# Altium PCB PCB1.PcbDoc
Units mil, origin at the board's own origin, x right, y up, seen from the top; angles counter-clockwise.
Board outline 3120.27 x 1545.46 mil, 2 copper layers (Top Layer, Bottom Layer); 25 components, 32 nets, 100 pads, 4 vias.
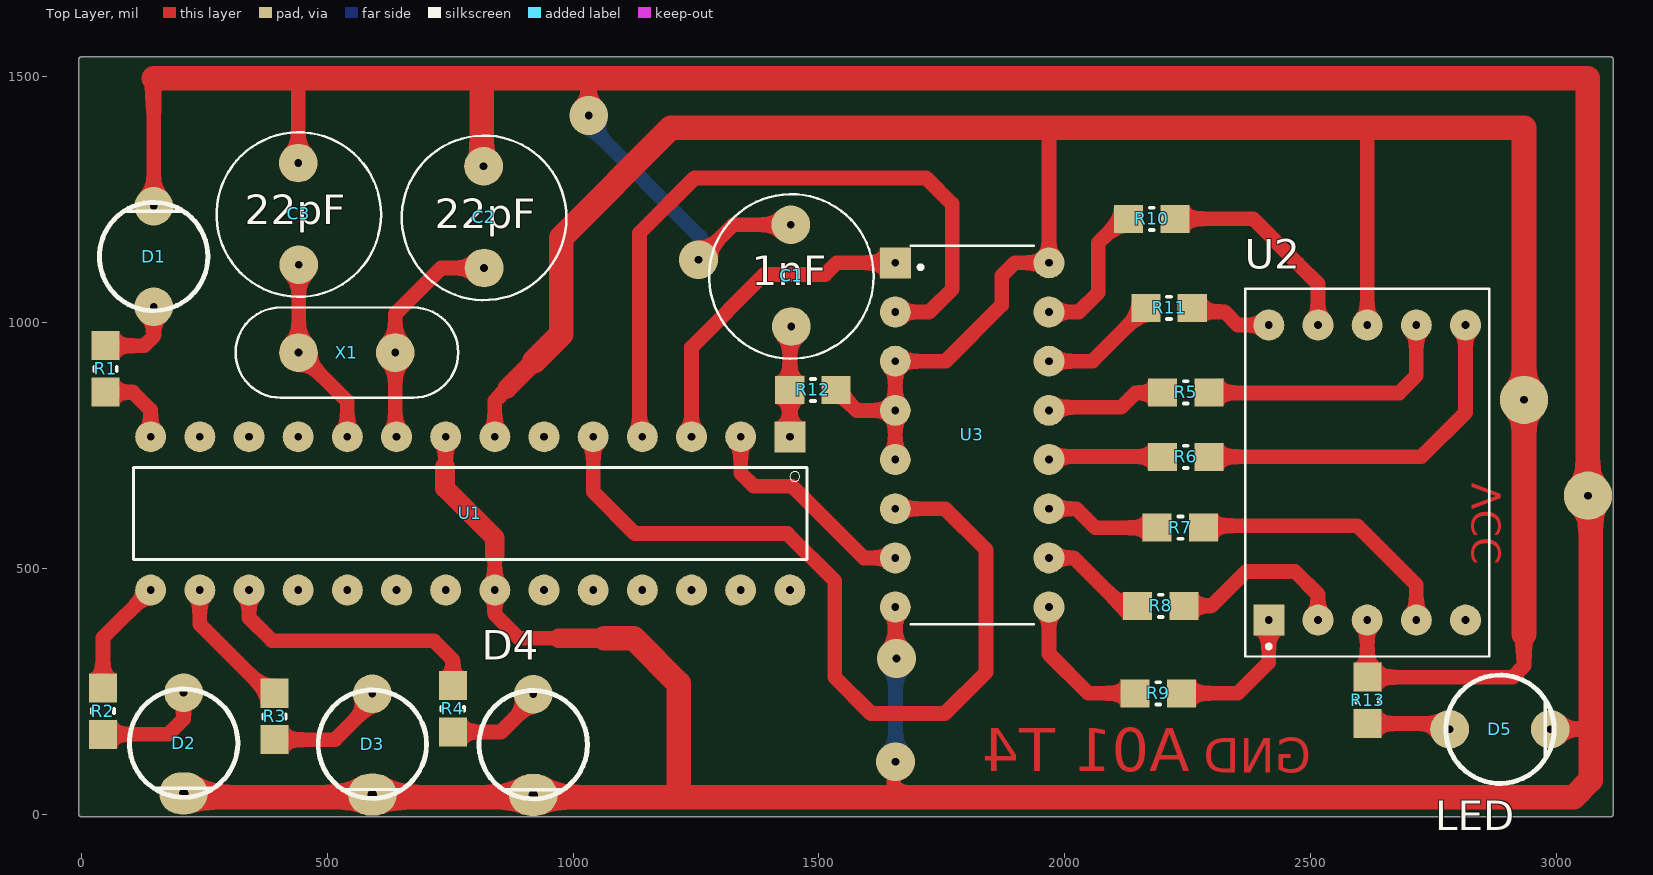
[diagram p0: Top Layer view]
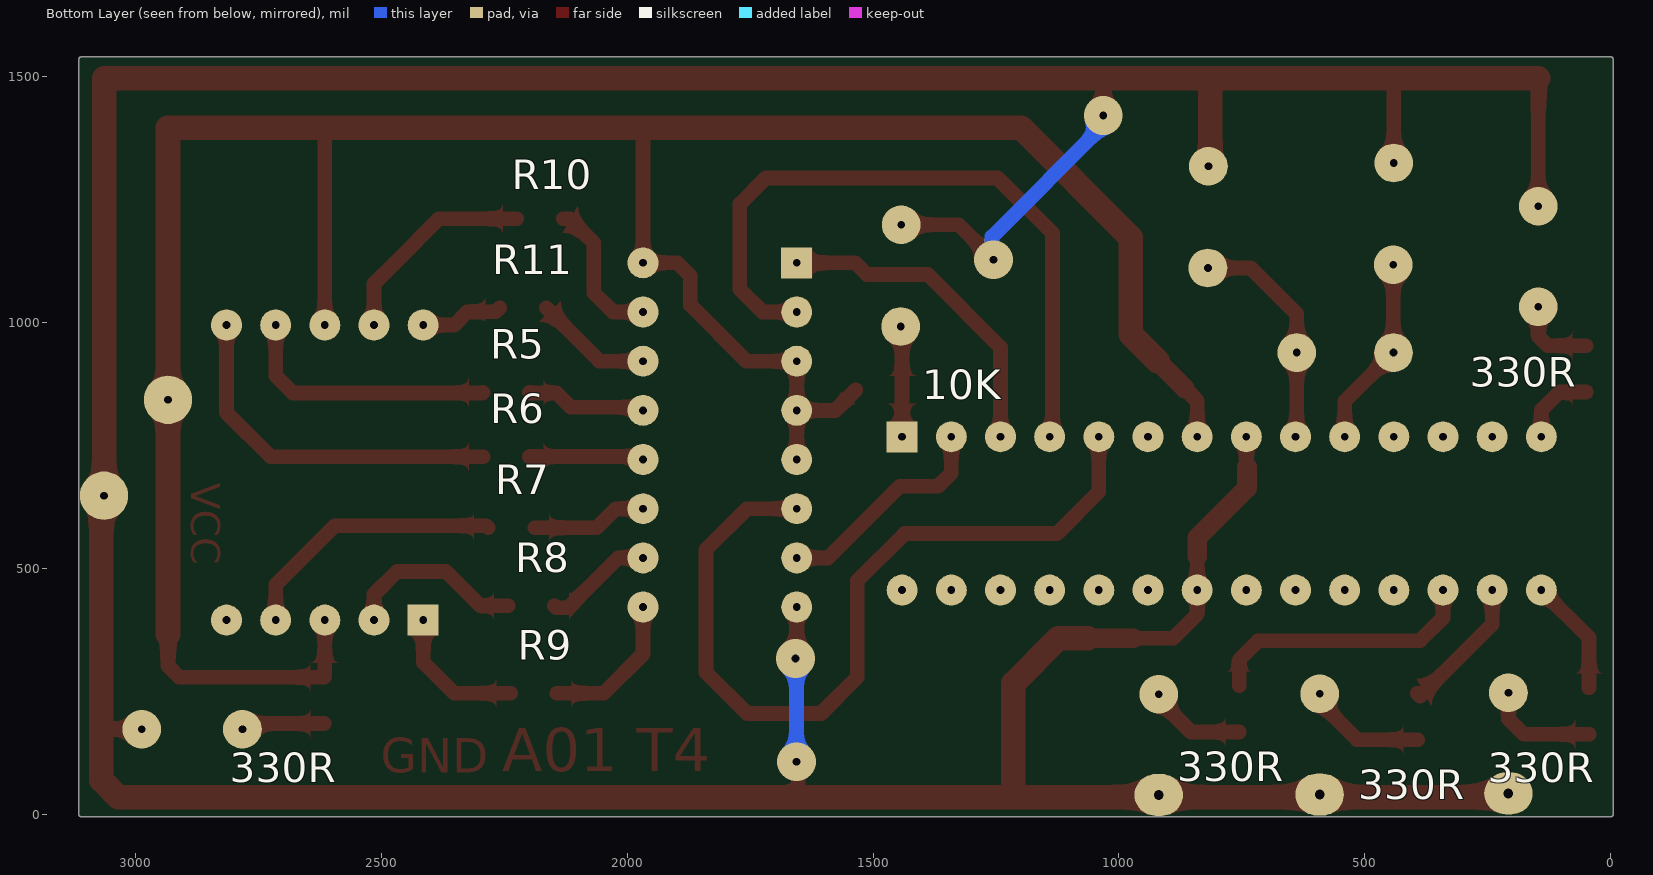
[diagram p1: Bottom Layer view, seen from below]
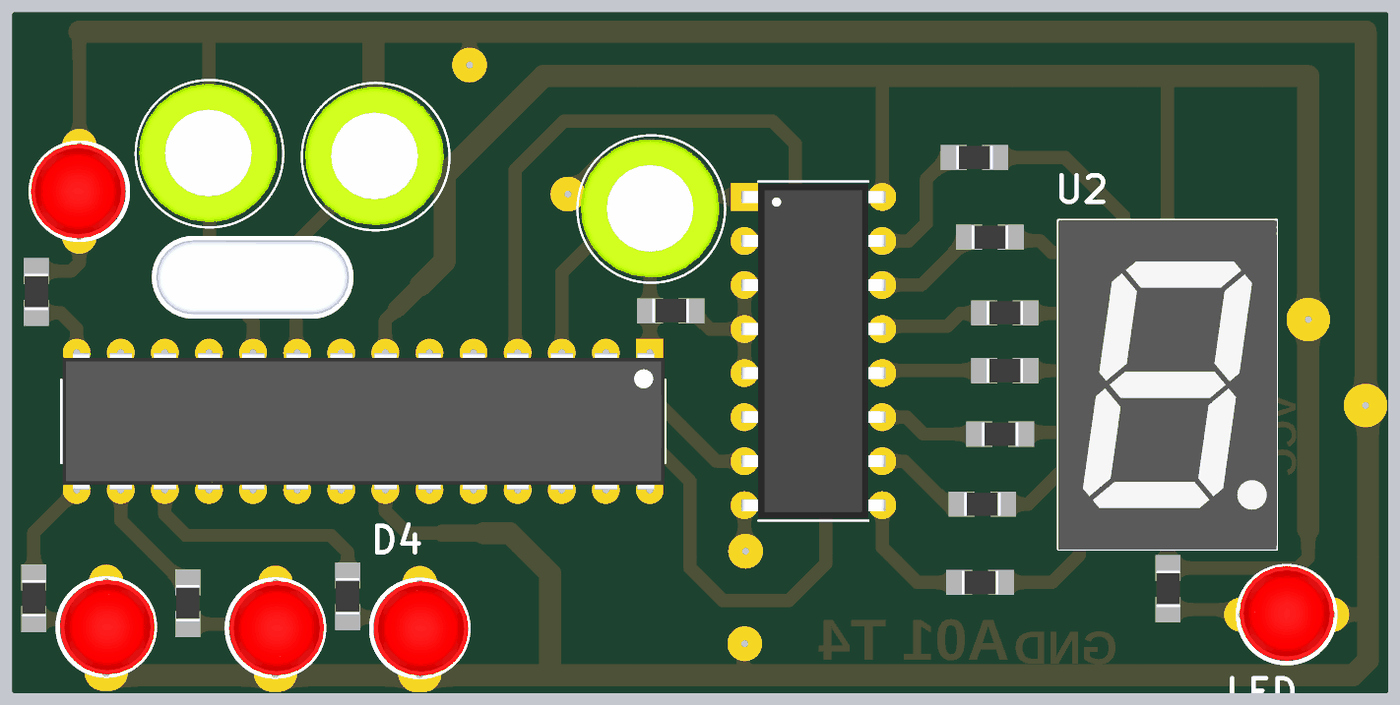
[diagram p2: 3D render of the assembled board from above, using the file's embedded part models]

## Layer stack, top to bottom
Top Solder: solder mask 0.4, Solder Resist, Dk 3.5
Top Layer: signal copper 1.4
Dielectric 1: dielectric 12.6, FR-4, Dk 4.8
Bottom Layer: signal copper 1.4
Bottom Solder: solder mask 0.4, Solder Resist, Dk 3.5

## Board outline
0,-5.01 cw(c0,0) -5.01,0 -5.01,1535.43 cw(c0,1535.43) 0,1540.45 3110.24,1540.45 cw(c3110.24,1535.43) 3115.25,1535.43 3115.25,0 cw(c3110.24,0) 3110.24,-5.01

## Design rules (kind name [scope] priority, off if disabled: settings)
Clearance [All] p1: gap=30 ignorepadtopadclearanceinfootprint=FALSE except(0: Arc-Text Track-Text SMDPad-Text THPad-Text Via-Text Fill-Text Poly-Text Region-Text Text-Text)
PolygonConnect [All] p1: connectstyle=Relief reliefconductorwidth=10 reliefentries=4 polygonreliefangle="90 Angle" airgapwidth=10
RoutingVias [All] p1: holewidth=28 width=50 viastyle="Through Hole" minholewidth=28 minwidth=50 maxholewidth=28 maxwidth=50
SolderMaskExpansion [All] p1: expansion=0 istentingtop=FALSE
SupplyNets "Schematic Supply Nets_1" [InNet('VCC')] p1: voltage=0.000
SupplyNets "Schematic Supply Nets" [InNet('GND')] p2: voltage=0.000
Width [All] p1: maxlimit=50 minlimit=20 preferedwidth=30 minimp=50.000000 maximp=50.000000 favimp=50.000000
30 further rules are at their usual default settings.

## Components (designator, comment, footprint, x,y, rotation, side; value= is the part's Value field where it differs from the comment)
C1 "1nF" CAP_8X11MM 1444,992 r90 top
C2 "22pF" CAP_8X11MM 819.06,1111.06 r90 top
C3 "22pF" CAP_8X11MM 442.2,1117.66 r90 top
D1 "LED" LED-TH-2.54MM-RED#1 147.14,1134.36 r90 top
D2 "LED" LED-TH-2.54MM-RED#2 208,144.86 r270 top
D3 "LED" LED-TH-2.54MM-RED#2 591.87,142.6 r270 top
D4 "LED" LED-TH-2.54MM-RED#2 919.11,141.73 r270 top
D5 "LED" LED-TH-2.54MM-RED#1 2885,173 r0 top
R1 "330R" RES0805_SMD 49.53,905.86 r90 top
R2 "330R" RES0805_SMD 44,210 r270 top
R3 "330R" RES0805_SMD 393,199 r270 top
R4 "330R" RES0805_SMD 755.49,214.72 r270 top
R5 "470R" RES0805_SMD 2246,858 r180 top
R6 "470R" RES0805_SMD 2246,727 r180 top
R7 "470R" RES0805_SMD 2235.24,583 r180 top
R8 "470R" RES0805_SMD 2195,424 r180 top
R9 "470R" RES0805_SMD 2190,246 r180 top
R10 "470R" RES0805_SMD 2177,1211 r180 top
R11 "470R" RES0805_SMD 2212,1030 r180 top
R12 "10K" RES0805_SMD 1488,863 r0 top
R13 "330R" RES0805_SMD 2616.05,231.71 r90 top
U1 "ATMEGA328P-PU" DIP794W46P254L2967H457Q28B 791,611.91 r270 top
U2 "7-SEG-LED" LED_INND-TS56YGAB 2615,695 r90 top
U3 "SN74LS47N" DIP794W45P254L1930H508Q16 1811.62,771.48 r0 top
X1 "CRYSTAL RESONATOR" XTAL_HC49P488W43L1150T466H350 540.11,939 r0 top

## Footprints (in the part's own frame and the unit in brackets; to place one, negate y for a bottom-side part, rotate by r counter-clockwise, add the part's x,y. Pads: shape width x height; smd on the part's side, far side on the other; paste and mask are expansions set on the pad)
CAP_8X11MM [mm]
  round 2 hole 0.4: 1(0,0) 2(5.258,0.025)
  silkscreen extent -1.66,-4.25 6.84,4.25, body extent -1.37,-3.94 6.63,4.06, height 12.52
DIP794W45P254L1930H508Q16 [mm]
  rect 1.6x1.6 hole 0.4: 1(-3.97,8.89)
  round 1.6 hole 0.4: 2(-3.97,6.35) 3(-3.97,3.81) 4(-3.97,1.27) 5(-3.97,-1.27) 6(-3.97,-3.81) 7(-3.97,-6.35) 8(-3.97,-8.89) 9(3.97,-8.89) 10(3.97,-6.35) 11(3.97,-3.81) 12(3.97,-1.27) 13(3.97,1.27) 14(3.97,3.81) 15(3.97,6.35) 16(3.97,8.89)
  silkscreen extent -3.17,-9.78 3.17,9.78, body extent -4.15,-9.65 4.15,9.65, height 5.08
DIP794W46P254L2967H457Q28B [mm]
  rect 1.6x1.6 hole 0.4: 1(-3.96,16.51)
  round 1.6 hole 0.4: 2(-3.96,13.97) 3(-3.96,11.43) 4(-3.96,8.89) 5(-3.96,6.35) 6(-3.96,3.81) 7(-3.96,1.27) 8(-3.96,-1.27) 9(-3.96,-3.81) 10(-3.96,-6.35) 11(-3.96,-8.89) 12(-3.96,-11.43) 13(-3.96,-13.97) 14(-3.96,-16.51) 15(3.96,-16.51) 16(3.96,-13.97) 17(3.96,-11.43) 18(3.96,-8.89) 19(3.96,-6.35) 20(3.96,-3.81) 21(3.96,-1.27) 22(3.96,1.27) 23(3.96,3.81) 24(3.96,6.35) 25(3.96,8.89) 26(3.96,11.43) 27(3.96,13.97) 28(3.96,16.51)
  silkscreen extent -2.38,-17.4 2.38,17.4, body extent -3.95,-17.32 3.95,17.35, height 4.57
LED-TH-2.54MM-RED#1 [mm]
  round 2 hole 0.4: 1(-2.6,0) 2(2.6,0)
  silkscreen extent -2.8,-2.8 2.8,2.8, body extent -2.72,-2.65 2.72,2.8, height 12.31
LED-TH-2.54MM-RED#2 [mm]
  round 2 hole 0.4: 1(-2.6,0)
  oval 2.159x2.5 hole 0.5: 2(2.6,0)
  silkscreen extent -2.8,-2.8 2.8,2.8, body extent -2.72,-2.65 2.72,2.8, height 12.31
LED_INND-TS56YGAB [mm]
  rect 1.6x1.6 hole 0.4: 1(-7.62,5.08)
  round 1.6 hole 0.4: 2(-7.62,2.54) 3(-7.62,0) 4(-7.62,-2.54) 5(-7.62,-5.08) 6(7.62,-5.08) 7(7.62,-2.54) 8(7.62,0) 9(7.62,2.54) 10(7.62,5.08)
  silkscreen extent -9.5,-6.3 9.5,6.3, body extent -9.5,-6.3 9.5,6.3, height 8.51
RES0805_SMD [mm]
  rect 1.5x1.45 smd: 1(-1.2,0) 2(1.2,0)
  silkscreen extent -0.1,-0.58 0.1,0.58, body extent -1.05,-0.67 1.05,0.67, height 0.6
XTAL_HC49P488W43L1150T466H350 [mm]
  round 2 hole 0.4: 1(-2.5,0) 2(2.5,0)
  silkscreen extent -5.75,-2.33 5.75,2.33, body extent -5.75,-2.33 5.75,2.33, height 3.5

## Part data
C1 C2 C3: library part CAPACITOR
R1 R2 R3 R4 R5 R6 R7 R8 R9 R10 R11 R12 R13: library part RESISTOR, "Resistor Symbol"
U1: "ATmega Series 20 MHz 32 KB Flash 2 KB SRAM 8-Bit Microcontroller - DIP-28", Package=None, Availability=Unavailable, MP=ATMEGA328P-PU, Price=None
U2: Package=None, Availability=Unavailable, MF="{'manufacturer': u'Inolux'}", MP=INND-TS56YGAB, Price=None
U3: "BCD-to-Seven-Segment Decoders/Drivers", Package="PDIP-16 Texas Instruments", Check_prices=https://www.snapeda.com/parts/SN74LS47N/Texas+Instruments/view-part/?ref=eda, MF="Texas Instruments", MP=SN74LS47N, SnapEDA_Link=https://www.snapeda.com/parts/SN74LS47N/Texas+Instruments/view-part/?ref=snap

## Free pads (board coordinates)
  round 98.43 hole 15.75: 2(2934,843) 3(3064,648)

## Via types
v1: diameter 78.74, hole 15.75, Top Layer to Bottom Layer, 4 vias

## Nets (pads, with @x,y where several pads share a name; then routed paths per layer and width w, separated by ;. In a path a pad name is that pad's centre, name@x,y a point inside that pad or via, vN(x,y) a via of type N, cw(c..) or ccw(c..) an arc to the next point about the centre after c; other vN are vias at no path point)
A: U1.2 U3.7 | length 459.6
  Top Layer w30: U1.2 1341,694 1368,667 1446,667 1591.52,521.48 U3.7
AX1: C2.1 U1.9 X1.2 | length 470
  Top Layer w30: U1.9 638.54,770.27 X1.2 638.54,1017.54 732.06,1111.06 C2.1
AX2: C3.1 U1.10 X1.1 | length 391.2
  Top Layer w30: C3.1 442.2,952.7 441.69,952.19 X1.1 541,839.69 U1.10
B: U1.3 U3.1 | length 667.5
  Top Layer w30: U1.3 1241,950 1389,1098 1513,1098 1536.48,1121.48 U3.1
C: U1.4 U3.2 | length 1429
  Top Layer w30: U1.4 1135,773.81 1135,1182 1247,1294 1718,1294 1771,1241 1771,1068 1724.48,1021.48 U3.2
D: U1.5 U3.6 | length 1715.5
  Top Layer w30: U1.5 1041,656 1126,571 1436,571 1532,475 1532,279 1606,205 1756,205 1840,289 1840,538 1756.52,621.48 U3.6
GND: C1.2 C2.2 C3.2 D1.2 D2.2 D3.2 D4.2 D5.2 pad.3 U1.8 U1.22 U3.8 | length 10078.1
  Top Layer w30: D1.2 147.14,1497 ; C3.2 441.2,1492.2 446,1497 ; 739.64,706.18 741,707.54 U1.8 ; 841,525 U1.22 841,407 890,358 971,358 ; v1(1032,1421) 1032,1497 ; v1(1255,1128) 1326,1199 C1.2 ; U3.8 1655.32,319.68 v1(1658,317) ; v1(1656,107) 1652,103 1652,58 1675,35 ; D5.2 3069.54,173
  Top Layer w40: 739.64,706.18 739.64,663.36 841,562 841,525 ; 971,358 1064,358
  Top Layer w50: 147.14,1497 446,1497 814,1497 ; D2.2@211.01,35 D3.2@591.87,35 ; D3.2 D3.2@591.87,35 ; C2.2 814,1322.11 814,1497 ; D4.2 D4.2@919.11,35 ; 1064,358 1123,358 1215,266 1215,35 ; D3.2@591.87,35 D4.2@919.11,35 ; 814,1497 1032,1497 3064,1497 pad.3 3069.54,642.46 3069.54,173 3069.54,69.83 3034.71,35 1675,35 1215,35 ; D4.2@919.11,35 1215,35
  Bottom Layer w30: v1(1032,1421) 1031,1420 1031,1402 1258,1175 1258,1131 v1(1255,1128) ; v1(1656,107) 1656,301 1652,305 1652,311 v1(1658,317)
LED1: R1.1 U1.14 | length 160.8
  Top Layer w30: R1.1 104.39,858.61 141,822 U1.14
LED2: R2.1 U1.15 | length 238.9
  Top Layer w30: R2.1 44,359 U1.15
LED3: R3.1 U1.16 | length 284.5
  Top Layer w30: U1.16 241,386.43 387.09,240.34 R3.1
LED4: R4.1 U1.17 | length 558.4
  Top Layer w30: U1.17 341,400 388,353 717,353 755.49,314.51 R4.1
LR1: R5.1 U2.7 | length 539.7
  Top Layer w30: R5.1 2294.24,857 2680,857 2715,892 2715,986.82 U2.7
LR2: R6.1 U2.6 | length 737
  Top Layer w30: R6.1 2725,727 2815,817 U2.6
LR3: R7.1 U2.4 | length 555.9
  Top Layer w30: R7.1 2286.49,587 2595,587 2715,467 U2.4
LR4: R8.1 U2.2 | length 373.2
  Top Layer w30: R8.1 2299,424 2369,494 2468,494 2515,447 U2.2
LR5: R9.1 U2.1 | length 289.9
  Top Layer w30: R9.1 2352,246 2415,309 U2.1
LR6: R10.1 U2.9 | length 428.4
  Top Layer w30: R10.1@2225.23,1211 2383,1211 2474,1120 2515,1079 U2.9
LR7: R11.1 U2.10 | length 170.3
  Top Layer w30: R11.1 2267.24,1022 2325,1022 2352,995 U2.10
LS1: R5.2 U3.13 | length 246
  Top Layer w30: U3.13 1974.23,827.79 2114.79,827.79 2144,857 2197.76,857 R5.2
LS2: R6.2 U3.12 | length 233.8
  Top Layer w30: U3.12 1974.23,727.79 2040.21,727.79 2197.96,727.79 R6.2
LS3: R7.2 U3.11 | length 236
  Top Layer w30: U3.11 2023.52,621.48 2062,583 2098.47,583 R7.2
LS4: R8.2 U3.10 | length 223.5
  Top Layer w30: U3.10 2018.52,521.48 2074,466 2120,420 2143.76,420 R8.2
LS5: R9.2 U3.9 | length 303.4
  Top Layer w30: U3.9 1967.92,326.08 2048,246 R9.2
LS6: R10.2 U3.15 | length 299.5
  Top Layer w30: U3.15 2028.48,1021.48 2068,1061 2068,1162 2117,1211 R10.2
LS7: R11.2 U3.14 | length 241.8
  Top Layer w30: U3.14 2056.24,921.48 2102.76,968 R11.2
NetD1_1: D1.1 R1.2 | length 165.4
  Top Layer w30: R1.2 128.1,953.1 147.14,972.14 D1.1
NetD2_1: D2.1 R2.2 | length 230.2
  Top Layer w30: R2.2 176.76,162.76 208,194 D2.1
NetD3_1: D3.1 R3.2 | length 247.5
  Top Layer w30: R3.2 515.76,151.76 591.87,227.87 D3.1
NetD4_1: D4.1 R4.2 | length 201.8
  Top Layer w30: R4.2 853.48,167.48 919.11,233.11 D4.1
NetD5_1: D5.1 R13.1 | length 171.3
  Top Layer w30: R13.1 2771.17,184.47 D5.1
reset: C1.1 R12.1 U1.1 | length 225.4
  Top Layer w30: U1.1 1441,989 C1.1
VCC: pad.2 R12.2 R13.2 U1.7 U2.3 U2.8 U3.3 U3.4 U3.5 U3.16 | length 5502.7
  Top Layer w30: U1.7 841,841 866.14,866.14 ; R12.2 1576.76,821.48 U3.4 ; U3.5 U3.4 ; 1967,1396 1967.92,1395.08 U3.16 1898.48,1121.48 1872,1095 1872,1036 1757.48,921.48 U3.3 U3.4 ; 2611,1396 2615,1392 U2.8 ; U2.3 2615,280.01 R13.2 2910.96,278.96 2934,302 2934,366 ; 2928,1210 2934,1204
  Top Layer w40: 866.14,866.14 921,921
  Top Layer w50: 921,921 975.96,975.96 975.96,1172.81 1199.15,1396 1967,1396 2611,1396 2934,1396 pad.2 2934,366
pads on no net: U1.6 U1.11 U1.12 U1.13 U1.18 U1.19 U1.20 U1.21 U1.23 U1.24 U1.25 U1.26 U1.27 U1.28 U2.5

## Other copper
Top Layer:
  text "VCC" at 2905.91,674 h100 r90
  text "GND" at 2501,61.31 h120
  text "A01 T4" at 2254,58 h150